# EAGLE board CT_schematic (EAGLE 7.6.0)

Size 100 x 80 mm. Coordinates in mm from the lower left corner, seen from the top.
Outline: 0,0 100,0 100,80 0,80 0,0
Copper layers (1*16): Top 0.035mm / dielectric 1.5mm / Bottom 0.035mm
Design rules "default": minimum track width 10mil, minimum drill 24mil, track to track 8mil, track to pad 8mil, pad to pad 8mil, via to via 8mil, smd to smd 8mil, copper to edge 40mil, drill to drill 8mil, minimum pad ring 10mil, minimum via ring 8mil, stop-mask expansion 4mil, vias tented up to drill 0mil, thermal gap 10mil

## Footprints (pad centres in the part's own frame; a part is rotated, then mirrored left to right if it is on the bottom)
C0603 = smd 0.8 x 0.8: 1 -0.762,0; 2 0.762,0
C0805 = smd 1.2 x 1.3: 1 -1.016,0; 2 1.016,0
C0402 = smd 0.5 x 0.5: 1 -0.508,0; 2 0.508,0
C1210 = smd 1.2 x 2.5: 1 -1.524,0; 2 1.524,0
EXV-9H = smd 3.505 x 1.676: 1 -2.857,0; 2 2.857,0
L0603 = smd 0.8 x 0.8: 1 -0.762,0; 2 0.762,0
L1210 = smd 1.2 x 2.5: 1 -1.524,0; 2 1.524,0
PJ-037B_PACKAGE = drill 3.7 square: 1 12,0 | drill 3.2 square: 2 6,0
R0603 = smd 0.8 x 0.8: 1 -0.762,0; 2 0.762,0
LQFP144 = smd 0.35 x 1.35: 1 -8.75,-10.625; 2 -8.25,-10.625; 3 -7.75,-10.625; 4 -7.25,-10.625; 5 -6.75,-10.625; 6 -6.25,-10.625; 7 -5.75,-10.625; 8 -5.25,-10.625; 9 -4.75,-10.625; 10 -4.25,-10.625; 11 -3.75,-10.625; 12 -3.25,-10.625; 13 -2.75,-10.62; 14 -2.25,-10.625; 15 -1.75,-10.625; 16 -1.25,-10.625; 17 -0.75,-10.625; 18 -0.25,-10.625; 19 0.25,-10.625; 20 0.75,-10.625; 21 1.25,-10.625; 22 1.75,-10.625; 23 2.25,-10.625; 24 2.75,-10.62; 25 3.25,-10.625; 26 3.75,-10.625; 27 4.25,-10.625; 28 4.75,-10.625; 29 5.25,-10.625; 30 5.75,-10.625; 31 6.25,-10.625; 32 6.75,-10.625; 33 7.25,-10.625; 34 7.75,-10.625; 35 8.25,-10.625; 36 8.75,-10.625; 73 8.75,10.625; 74 8.25,10.625; 75 7.75,10.625; 76 7.25,10.625; 77 6.75,10.625; 78 6.25,10.625; 79 5.75,10.625; 80 5.25,10.625; 81 4.75,10.625; 82 4.25,10.625; 83 3.75,10.625; 84 3.25,10.625; 85 2.75,10.625; 86 2.25,10.625; 87 1.75,10.625; 88 1.25,10.625; 89 0.75,10.625; 90 0.25,10.625; 91 -0.25,10.625; 92 -0.75,10.625; 93 -1.25,10.625; 94 -1.75,10.625; 95 -2.25,10.625; 96 -2.75,10.625; 97 -3.25,10.625; 98 -3.75,10.625; 99 -4.25,10.625; 100 -4.75,10.625; 101 -5.25,10.625; 102 -5.75,10.625; 103 -6.25,10.625; 104 -6.75,10.625; 105 -7.25,10.625; 106 -7.75,10.625; 107 -8.25,10.625; 108 -8.75,10.625 | smd 1.35 x 0.35: 37 10.625,-8.75; 38 10.625,-8.25; 39 10.625,-7.75; 40 10.625,-7.25; 41 10.625,-6.75; 42 10.625,-6.25; 43 10.625,-5.75; 44 10.625,-5.25; 45 10.625,-4.75; 46 10.625,-4.25; 47 10.625,-3.75; 48 10.625,-3.25; 49 10.625,-2.75; 50 10.625,-2.25; 51 10.625,-1.75; 52 10.625,-1.25; 53 10.625,-0.75; 54 10.625,-0.25; 55 10.625,0.25; 56 10.625,0.75; 57 10.625,1.25; 58 10.625,1.75; 59 10.625,2.25; 60 10.625,2.75; 61 10.625,3.25; 62 10.625,3.75; 63 10.625,4.25; 64 10.625,4.75; 65 10.625,5.25; 66 10.625,5.75; 67 10.625,6.25; 68 10.625,6.75; 69 10.625,7.25; 70 10.625,7.75; 71 10.625,8.25; 72 10.625,8.75; 109 -10.625,8.75; 110 -10.625,8.25; 111 -10.625,7.75; 112 -10.625,7.25; 113 -10.625,6.75; 114 -10.625,6.25; 115 -10.625,5.75; 116 -10.625,5.25; 117 -10.625,4.75; 118 -10.625,4.25; 119 -10.625,3.75; 120 -10.625,3.25; 121 -10.625,2.75; 122 -10.625,2.25; 123 -10.625,1.75; 124 -10.625,1.25; 125 -10.625,0.75; 126 -10.625,0.25; 127 -10.625,-0.25; 128 -10.625,-0.75; 129 -10.625,-1.25; 130 -10.625,-1.75; 131 -10.625,-2.25; 132 -10.625,-2.75; 133 -10.625,-3.25; 134 -10.625,-3.75; 135 -10.625,-4.25; 136 -10.625,-4.75; 137 -10.625,-5.25; 138 -10.625,-5.75; 139 -10.625,-6.25; 140 -10.625,-6.75; 141 -10.625,-7.25; 142 -10.625,-7.75; 143 -10.625,-8.25; 144 -10.625,-8.75
SSOP-16 = smd 1.981 x 0.356: 1 -2.464,2.223; 2 -2.464,1.587; 3 -2.464,0.953; 4 -2.464,0.318; 5 -2.464,-0.318; 6 -2.464,-0.953; 7 -2.464,-1.587; 8 -2.464,-2.223; 9 2.464,-2.223; 10 2.464,-1.587; 11 2.464,-0.953; 12 2.464,-0.318; 13 2.464,0.318; 14 2.464,0.953; 15 2.464,1.587; 16 2.464,2.223
182-009-MALE = drill 1.194 pad 1.524 octagon: 1 -5.537,10.923; 2 -2.769,10.923; 3 0,10.923; 4 2.769,10.923; 5 5.537,10.923; 6 -4.153,8.08; 7 -1.384,8.08; 8 1.384,8.08; 9 4.153,8.08 | hole 3.048: -12.446,9.501; 12.446,9.501
TH58NVG3S0HBAI4 = smd 0.46 x 0.46: A1 -5.6,2.4; A2 -5.6,1.6; A9 -5.6,-5.6; A10 -5.6,-6.4; B1 -4.8,2.4; B9 -4.8,-5.6; B10 -4.8,-6.4; C3 -4,0.8; C4 -3.2,0.8; C5 -2.4,0.8; C6 -1.6,0.8; C7 -0.8,0.8; C8 0,0.8; D3 -4,0; D4 -3.2,0; D5 -2.4,0; D6 -1.6,0; D7 -0.8,0; D8 0,0; E3 -4,-0.8; E4 -3.2,-0.8; E5 -2.4,-0.8; E6 -1.6,-0.8; E7 -0.8,-0.8; E8 0,-0.8; F3 -4,-1.6; F4 -3.2,-1.6; F5 -2.4,-1.6; F6 -1.6,-1.6; F7 -0.8,-1.6; F8 0,-1.6; G3 -4,-2.4; G4 -3.2,-2.4; G5 -2.4,-2.4; G6 -1.6,-2.4; G7 -0.8,-2.4; G8 0,-2.4; H3 -4,-3.2; H4 -3.2,-3.2; H5 -2.4,-3.2; H6 -1.6,-3.2; H7 -0.8,-3.2; H8 0,-3.2; J3 -4,-4; J4 -3.2,-4; J5 -2.4,-4; J6 -1.6,-4; J7 -0.8,-4; J8 0,-4; K3 -4,-4.8; K4 -3.2,-4.8; K5 -2.4,-4.8; K6 -1.6,-4.8; K7 -0.8,-4.8; K8 0,-4.8; L1 0.8,2.4; L2 0.8,1.6; L9 0.8,-5.6; L10 0.8,-6.4; M1 1.6,2.4; M2 1.6,1.6; M9 1.6,-5.6; M10 1.6,-6.4
ASEK = smd 1.4 x 1: 1 -1.1,-0.8; 2 1.1,-0.8; 3 1.1,0.8; 4 -1.1,0.8
ASFL1 = smd 1.7 x 1.5: 1 -1.27,-1.1; 2 1.27,-1.1; 3 1.27,1.1; 4 -1.27,1.1
WSON-8 = smd 0.3 x 0.6: 1 -0.75,0; 2 0.05,0; 3 0.85,0; 4 1.65,0; 5 1.65,3.8; 6 0.85,3.8; 7 0.05,3.8; 8 -0.75,3.8 | smd 3 x 2.6: PAD 0.45,1.9
SON-6 = smd 0.55 x 0.3: 1 -0.355,0.5 | smd 0.52 x 0.3: 2 -0.37,0; 3 -0.37,-0.5; 4 0.37,-0.5; 5 0.37,0; 6 0.37,0.5
SW_4-1437565-2 = smd 1.4 x 2.1: 1 -2.23,4.55; 2 -2.23,-4.55; 3 2.23,4.55; 4 2.23,-4.55
LGM67K-G1J2-24-Z = smd 0.8 x 1.4: A -2,0; C 0,0
NC7SZ125M5X = smd 1.3 x 0.7: 1 -1.3,0.95; 2 -1.3,0; 3 -1.3,-0.95; 4 1.3,-0.95; 5 1.3,0.95
DUMMY_PACKAGE_140 = drill 0.3: 1 0,-1; 2 1.5,-1

## Placement (x,y rotation side)
C1  1e-06  [C0603]  -41.91,66.04 0 top  (outside the outline)
C2  1e-07  [C0603]  -45.72,66.04 0 top  (outside the outline)
C3  1e-07  [C0603]  -49.53,66.04 0 top  (outside the outline)
C4  1e-07  [C0603]  -53.34,66.04 0 top  (outside the outline)
C5  1e-07  [C0603]  -57.15,66.04 0 top  (outside the outline)
C6  1e-07  [C0603]  -60.96,66.04 0 top  (outside the outline)
C7  1e-07  [C0603]  -64.77,66.04 0 top  (outside the outline)
C8  4.7e-06  [C0603]  -34.29,66.04 0 top  (outside the outline)
C9  1e-07  [C0603]  -68.58,66.04 0 top  (outside the outline)
C10  1e-07  [C0603]  -72.39,66.04 0 top  (outside the outline)
C11  1e-07  [C0603]  -15.24,71.12 0 top  (outside the outline)
C12  1e-07  [C0603]  -19.05,71.12 0 top  (outside the outline)
C13  1e-07  [C0603]  -22.86,71.12 0 top  (outside the outline)
C14  1e-07  [C0603]  -26.67,71.12 0 top  (outside the outline)
C15  1e-08  [C0603]  -30.48,71.12 0 top  (outside the outline)
C16  1e-08  [C0603]  -34.29,71.12 0 top  (outside the outline)
C17  1e-06  [C0603]  -38.1,71.12 0 top  (outside the outline)
C18  1e-06  [C0603]  -41.91,71.12 0 top  (outside the outline)
C19  1e-06  [C0603]  -45.72,71.12 0 top  (outside the outline)
C20  2.2e-07  [C0603]  -38.1,66.04 0 top  (outside the outline)
C21  1e-06  [C0603]  -49.53,71.12 0 top  (outside the outline)
C22  1e-06  [C0603]  -53.34,71.12 0 top  (outside the outline)
C23  1e-05  [C0805]  -34.29,59.69 0 top  (outside the outline)
C24  1e-07  [C0402]  -19.05,76.2 0 top  (outside the outline)
C25  1e-07  [C0402]  -22.86,76.2 0 top  (outside the outline)
C26  1e-08  [C0402]  -26.67,76.2 0 top  (outside the outline)
C27  1e-08  [C0402]  -30.48,76.2 0 top  (outside the outline)
C28  1e-08  [C0402]  -34.29,76.2 0 top  (outside the outline)
C29  1e-05  [C1210]  -71.12,52.07 0 top  (outside the outline)
C30  1e-05  [C1210]  -16.51,60.96 0 top  (outside the outline)
C31  1e-07  [C0402]  -38.1,76.2 0 top  (outside the outline)
C32  0.0001  [EXV-9H]  -38.1,53.34 0 top  (outside the outline)
C33  0.0001  [EXV-9H]  -49.53,53.34 0 top  (outside the outline)
C34  1e-08  [C0402]  -41.91,76.2 0 top  (outside the outline)
F1  240.0  [L0603]  -57.15,71.12 0 top  (outside the outline)
I1  1e-05  [L1210]  -22.86,60.96 0 top  (outside the outline)
J1  PJ-037B  [PJ-037B_PACKAGE]  -45.72,30.48 0 top  (outside the outline)
R2  1000.0  [R0603]  -60.96,71.12 0 top  (outside the outline)
R4  4700.0  [R0603]  -64.77,71.12 0 top  (outside the outline)
R5  10000.0  [R0603]  -59.69,59.69 0 top  (outside the outline)
R6  100000.0  [R0603]  -39.37,59.69 0 top  (outside the outline)
R7  10000.0  [R0603]  -64.77,59.69 0 top  (outside the outline)
R8  10000.0  [R0603]  -69.85,59.69 0 top  (outside the outline)
R9  10000.0  [R0603]  -74.93,59.69 0 top  (outside the outline)
R10  10000.0  [R0603]  -15.24,66.04 0 top  (outside the outline)
R11  10000.0  [R0603]  -20.32,66.04 0 top  (outside the outline)
R12  100000.0  [R0603]  -44.45,59.69 0 top  (outside the outline)
R13  2231.0  [R0603]  -68.58,71.12 0 top  (outside the outline)
R14  1000.0  [R0603]  -72.39,71.12 0 top  (outside the outline)
R15  10000.0  [R0603]  -25.4,66.04 0 top  (outside the outline)
R16  10000.0  [R0603]  -30.48,66.04 0 top  (outside the outline)
R17  9100.0  [R0603]  -15.24,76.2 0 top  (outside the outline)
R18  680000.0  [R0603]  -49.53,59.69 0 top  (outside the outline)
R19  120000.0  [R0603]  -54.61,59.69 0 top  (outside the outline)
U1  stm32f100zet6  [LQFP144]  -24.13,11.43 0 top  (outside the outline)
U2  LTC2804CGN-1#PBF  [SSOP-16]  -29.21,43.18 0 top  (outside the outline)
U3  182-009-113R531  [182-009-MALE]  -59.69,6.35 0 top  (outside the outline)
U4  TH58NVG3S0HBAI4  [TH58NVG3S0HBAI4]  -24.13,33.02 0 top  (outside the outline)
U5  ASEK-32.768KHz-ECST  [ASEK]  -29.21,53.34 0 top  (outside the outline)
U6  ASFL1-25MHZ-NCS  [ASFL1]  -67.31,43.18 0 top  (outside the outline)
U7  LP3878SDX-ADJ/NOPB  [WSON-8]  -50.8,40.64 0 top  (outside the outline)
U8  TPS3895ADRYR  [SON-6]  -49.53,74.93 0 top  (outside the outline)
U9  4-1437565-2  [SW_4-1437565-2]  -62.23,29.21 0 top  (outside the outline)
U10  Q65110A2395  [LGM67K-G1J2-24-Z]  -59.69,52.07 0 top  (outside the outline)
U11  nc7sz125m5x  [NC7SZ125M5X]  -27.94,59.69 0 top  (outside the outline)
U12  Dummy  [DUMMY_PACKAGE_140]  -46.99,76.2 0 top  (outside the outline)

## Library data of the parts
C1-C34 F1 I1 J1 R2 R4-R19 U1-U12 = circuit_tree

## Nets
CLK_U1_8: U1.8 U5.3
CLK_U1_23: U1.23 U6.3
GND: C1.2 C2.2 C3.2 C4.2 C5.2 C6.2 C7.2 C8.2 C9.2 C10.2 C11.2 C12.2 C13.2 C14.2 C15.2 C16.2 C17.2 C18.2 C19.2 C21.2 C22.2 C23.2 C24.2 C25.2 C26.2 C27.2 C28.2 C29.2 C30.2 C31.2 C32.2 C33.2 C34.2 J1.2 R2.2 R5.2 R14.2 R17.2 R19.2 U1.16 U1.30 U1.31 U1.38 U1.51 U1.61 U1.71 U1.83 U1.94 U1.107 U1.120 U1.130 U1.143 U2.8 U3.5 U4.C5 U4.K3 U4.K8 U5.2 U6.2 U7.3 U7.PAD U8.2 U10.C U11.1 U11.3 U12.1
NET_U1_25: R4.1 U1.25 U11.4
NET_U1_33: C15.1 C16.1 C17.1 F1.1 U1.32 U1.33
NET_U1_138: R5.1 U1.138
NET_U1_141: U10.A
NET_U1_142: U9.3 U9.4
NET_U2_6: C18.1 U2.6
NET_U2_7: C20.1 I1.2 U2.7
NET_U2_9: C19.1 U2.9
NET_U2_10: C20.2 U2.10
NET_U2_11: R6.1 U2.11
NET_U3_2: U2.1 U3.2
NET_U3_3: U2.3 U3.3
NET_U3_7: U2.2 U3.7
NET_U3_8: U2.4 U3.8
NET_U4_C3: R10.1 U4.C3
NET_U4_C6: R7.1 U4.C6
NET_U4_C8: R11.1 U4.C8
NET_U7_1: C28.1 U7.1
NET_U7_6: R13.2 R14.1 U7.6
NET_U7_8: R12.1 U7.8
NET_U8_1: R16.1 R17.1 U8.1
NET_U8_3: R18.2 R19.1 U8.3
NET_U8_4: R15.1 U8.4 U11.2
NET_U9_1: R2.1 U9.1 U9.2
PROC_DAC_OUT2: U1.41 U12.2
PROC_FSMC_D0: U1.85 U4.H4
PROC_FSMC_D1: U1.86 U4.J4
PROC_FSMC_D2: U1.114 U4.K4
PROC_FSMC_D3: U1.115 U4.K5
PROC_FSMC_D4: U1.58 U4.K6
PROC_FSMC_D5: U1.59 U4.J7
PROC_FSMC_D6: U1.60 U4.K7
PROC_FSMC_D7: U1.63 U4.J8
PROC_FSMC_NOE: R8.1 U1.118 U4.D4
PROC_FSMC_NWE: R9.1 U1.119 U4.C7
PROC_UART4_RX: U1.112 U2.16
PROC_UART4_TX: U1.111 U2.14
VCC_S1_12V7: C29.1 C32.1 C33.1 J1.1 R12.2 U7.4
VCC_TIER1_3V3: C1.1 C2.1 C3.1 C4.1 C5.1 C6.1 C7.1 C8.1 C9.1 C10.1 C11.1 C12.1 C13.1 C14.1 C21.1 C22.1 C23.1 C24.1 C25.1 C26.1 C27.1 C30.1 C31.1 C34.1 F1.2 I1.1 R4.2 R6.2 R7.2 R8.2 R9.2 R10.2 R11.2 R13.1 R15.2 R16.2 R18.1 U1.6 U1.17 U1.39 U1.52 U1.62 U1.72 U1.84 U1.95 U1.108 U1.121 U1.131 U1.144 U2.5 U2.12 U4.H8 U4.J6 U5.4 U6.4 U7.5 U8.6 U11.5

## Tracks (layer width: path | path; a pad name or v marks a point on that pad's centre or on a via)
CLK_U1_8  (1 unrouted)
CLK_U1_23  (1 unrouted)
GND  (65 unrouted)
NET_U1_25  (2 unrouted)
NET_U1_33  (5 unrouted)
NET_U1_138  (1 unrouted)
NET_U1_142  (1 unrouted)
NET_U2_6  (1 unrouted)
NET_U2_7  (2 unrouted)
NET_U2_9  (1 unrouted)
NET_U2_10  (1 unrouted)
NET_U2_11  (1 unrouted)
NET_U3_2  (1 unrouted)
NET_U3_3  (1 unrouted)
NET_U3_7  (1 unrouted)
NET_U3_8  (1 unrouted)
NET_U4_C3  (1 unrouted)
NET_U4_C6  (1 unrouted)
NET_U4_C8  (1 unrouted)
NET_U7_1  (1 unrouted)
NET_U7_6  (2 unrouted)
NET_U7_8  (1 unrouted)
NET_U8_1  (2 unrouted)
NET_U8_3  (2 unrouted)
NET_U8_4  (2 unrouted)
NET_U9_1  (2 unrouted)
PROC_DAC_OUT2  (1 unrouted)
PROC_FSMC_D0  (1 unrouted)
PROC_FSMC_D1  (1 unrouted)
PROC_FSMC_D2  (1 unrouted)
PROC_FSMC_D3  (1 unrouted)
PROC_FSMC_D4  (1 unrouted)
PROC_FSMC_D5  (1 unrouted)
PROC_FSMC_D6  (1 unrouted)
PROC_FSMC_D7  (1 unrouted)
PROC_FSMC_NOE  (2 unrouted)
PROC_FSMC_NWE  (2 unrouted)
PROC_UART4_RX  (1 unrouted)
PROC_UART4_TX  (1 unrouted)
VCC_S1_12V7  (5 unrouted)
VCC_TIER1_3V3  (57 unrouted)